# Altium PCB ESP32 PCB git.PcbDoc (part 1 of 2)
Units mil, origin at the board's own origin, x right, y up, seen from the top; angles counter-clockwise.
Board outline 2755 x 1050 mil, 4 copper layers (L1, L2, L3, L4), stack 61.583 mil thick; 64 components, 75 nets, 304 pads, 146 vias.
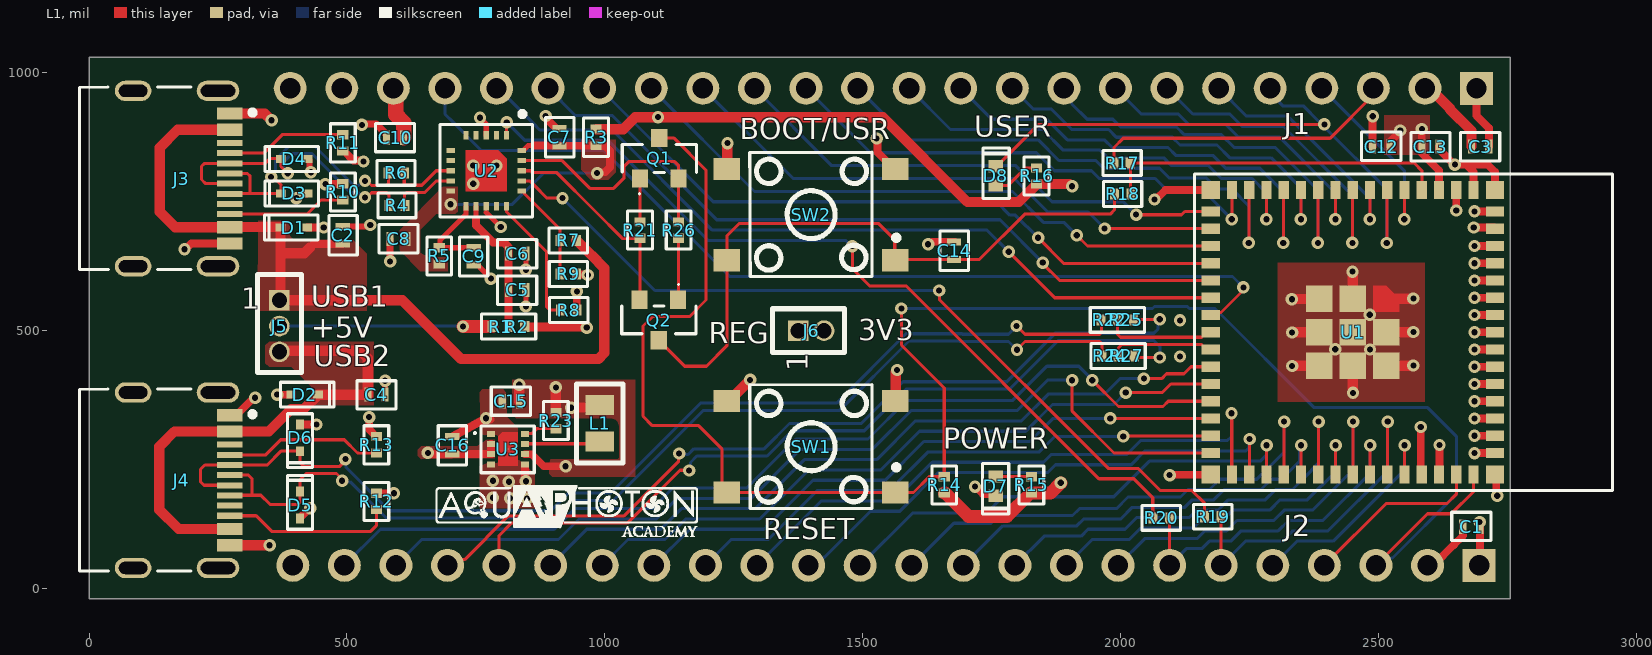
[diagram p0: L1 view]
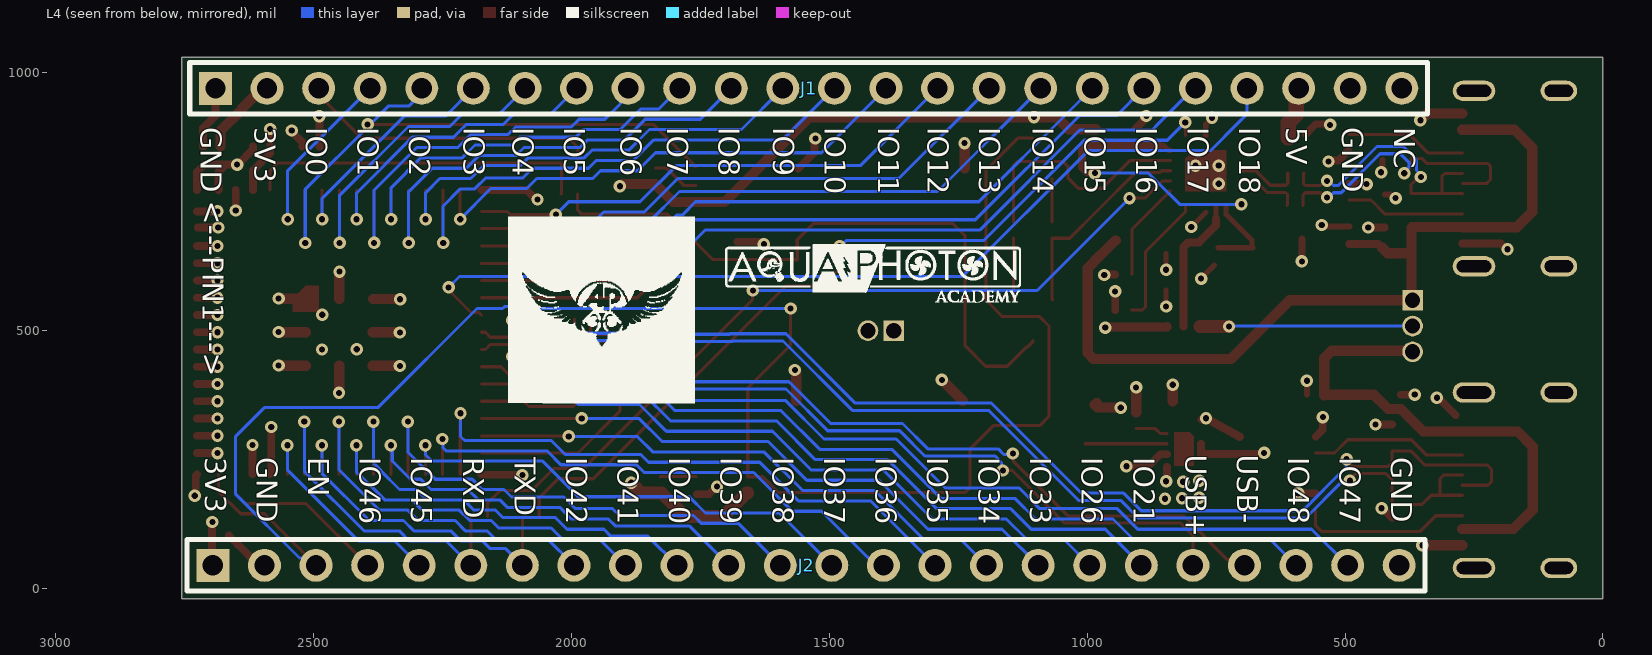
[diagram p1: L4 view, seen from below]
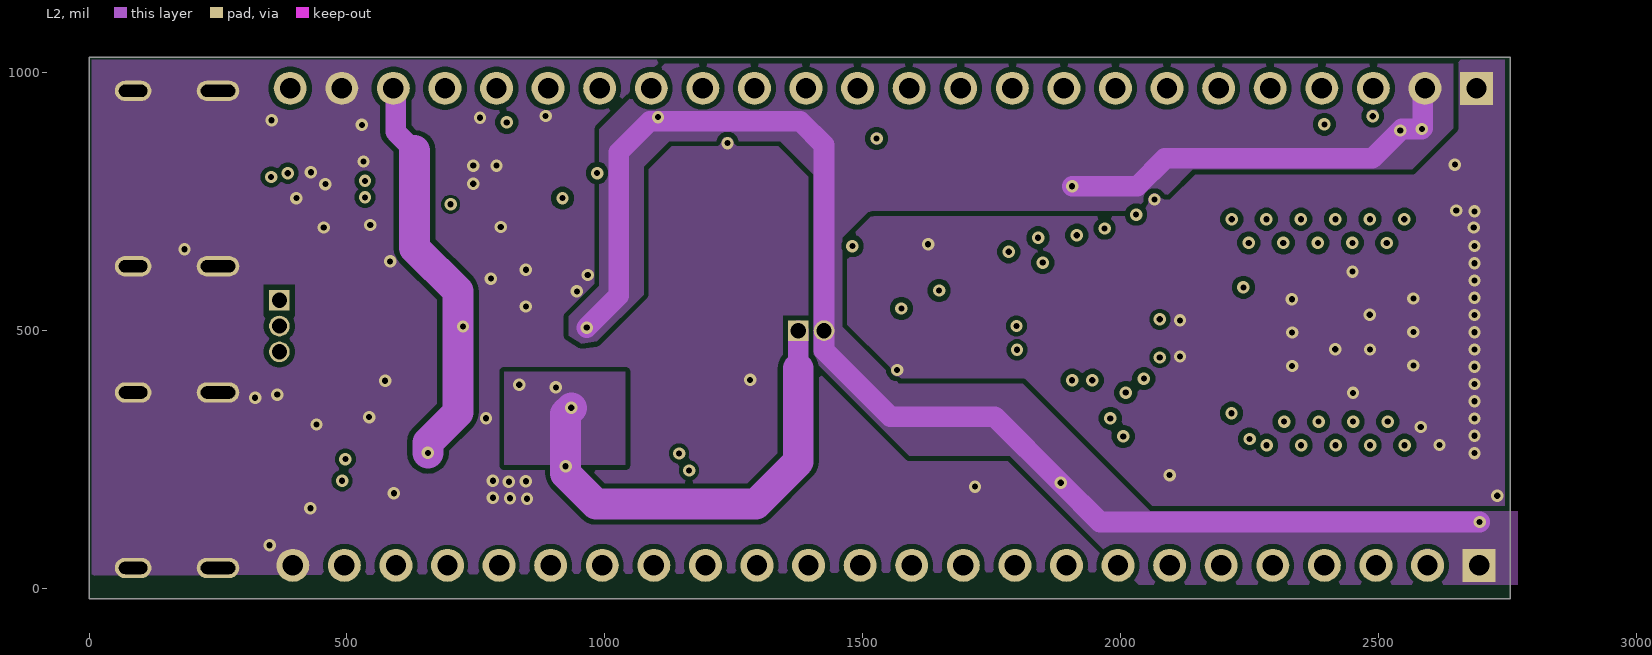
[diagram p2: L2]
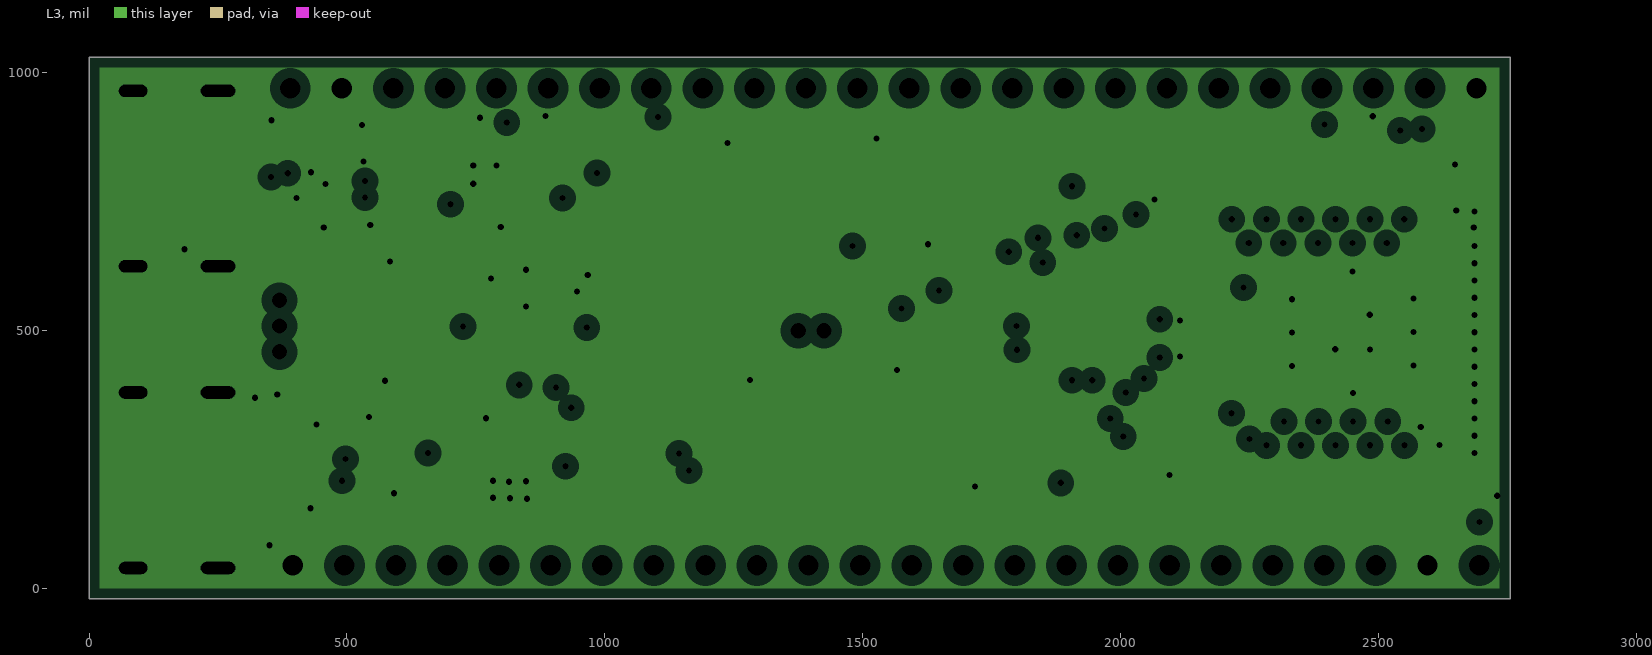
[diagram p3: L3, clearances drawn from the general rule]
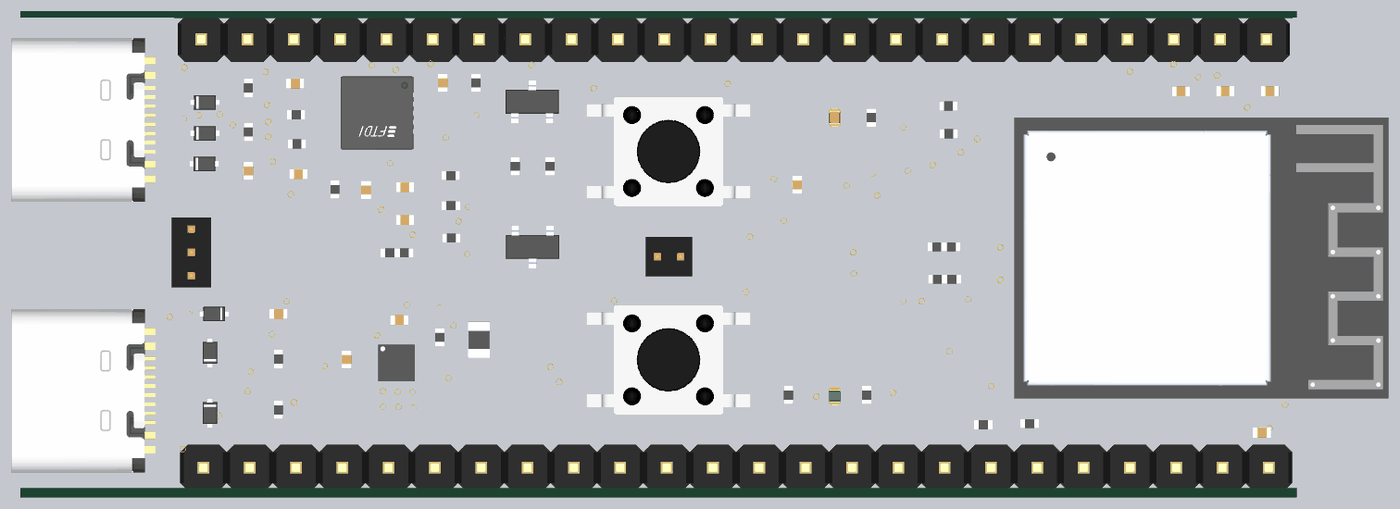
[diagram p4: 3D render of the assembled board from above, using the file's embedded part models]

## Layer stack, top to bottom
Top Solder: solder mask 0.4, Solder Resist, Dk 3.5
L1: signal copper 1.378
Dielectric 2: prepreg 3.9134, PP-006, Dk 4.1
L2: signal copper 0.5984
Dielectric 1: dielectric 49.8031, FR-4, Dk 4.8
L3: plane copper 0.5984, net GND
Dielectric 3: prepreg 3.9134, PP-006, Dk 4.1
L4: signal copper 1.378
Bottom Solder: solder mask 0.4, Solder Resist, Dk 3.5

## Board outline
0,-20 0,1030 2755,1030 2755,-20

## Design rules (kind name [scope] priority, off if disabled: settings)
Clearance SMALLER [WithinRoom('FTDI') or WithinRoom('USB-C2')or WithinRoom('USB-C1') or WithinRoom('BUCK')] p1: gap=6 ignorepadtopadclearanceinfootprint=FALSE
Clearance DIFF90 [InDifferentialPairClass('DIFF90')] p2: gap=8 ignorepadtopadclearanceinfootprint=FALSE
Clearance [All] p3: gap=10 ignorepadtopadclearanceinfootprint=FALSE except(6: SMDPad-SMDPad)
ComponentClearance R24_R27 [InComponent('R24') vs InComponent('R27')] p1: gap=0 collisioncheckmode=3 verticalgap=0 showdistances=FALSE
ComponentClearance R1_R2 [InComponent('R2') vs InComponent('R1')] p2: gap=0 collisioncheckmode=3 verticalgap=0 showdistances=FALSE
ComponentClearance R22_R25 [InComponent('R22') vs InComponent('R25')] p3: gap=0 collisioncheckmode=3 verticalgap=0 showdistances=FALSE
ComponentClearance [All] p4: gap=10 collisioncheckmode=3 verticalgap=10 showdistances=FALSE
DiffPairsRouting DIFF_1 [All] p1: maxlimit=8.1 minlimit=8 mostfreqgap=8 toplayer_minwidth=6.03 toplayer_maxwidth=6.23 toplayer_prefwidth=6.03 midlayer1_minwidth=5.1 midlayer1_maxwidth=5.2 midlayer1_prefwidth=5.1 bottomlayer_minwidth=6.03 bottomlayer_maxwidth=6.23 bottomlayer_prefwidth=6.03 maxuncoupledlength=500
MinimumSolderMaskSliver [All] p1: minsoldermaskwidth=3.15
PlaneClearance [All] p1: clearance=20
PlaneConnect [All] p1: pad.planeconnectstyle=Relief pad.reliefexpansion=20 pad.reliefentries=4 pad.reliefconductorwidth=20 pad.reliefairgap=10 via.planeconnectstyle=Direct via.reliefexpansion=20 via.reliefentries=4 via.reliefconductorwidth=10 via.reliefairgap=10
PolygonConnect [All] p1: connectstyle=Direct reliefconductorwidth=10 reliefentries=4 polygonreliefangle="90 Angle" airgapwidth=10
RoomDefinition BUCK [False vs False] p1: confinementstyle=ConfineIn formatcopy=TRUE lockcomponents=FALSE outline 750,216 872,216 872,331 750,331
RoomDefinition USB-C1 [False vs False] p2: confinementstyle=ConfineIn formatcopy=TRUE lockcomponents=FALSE outline 221,940 325,940 325,650 221,650
RoomDefinition USB-C2 [False vs False] p3: confinementstyle=ConfineIn formatcopy=TRUE lockcomponents=FALSE outline 215,351 343,351 343,68 215,68
RoomDefinition FTDI [False vs False] p4: confinementstyle=ConfineIn formatcopy=TRUE lockcomponents=FALSE outline 673,903 863,903 863,717 673,717
RoutingVias [All] p1: holewidth=12 width=24 viastyle="Through Hole" minholewidth=12 minwidth=24 maxholewidth=12 maxwidth=24
SilkToSilkClearance [All] p1: silktosilkclearance=6
SilkToSolderMaskClearance [IsPad] p1: minsilkscreentomaskgap=6 clearancetoexposedcopper=TRUE
SolderMaskExpansion [All] p1: expansion=2 istentingtop=FALSE
SupplyNets "Schematic Supply Nets_5" [InNet('GND')] p1: voltage=0.000
SupplyNets "Schematic Supply Nets_4" [InNet('+3V3_REG')] p2: voltage=0.000
SupplyNets "Schematic Supply Nets_3" [InNet('+5V_VBUS2')] p3: voltage=0.000
SupplyNets "Schematic Supply Nets_2" [InNet('+5V')] p4: voltage=0.000
SupplyNets "Schematic Supply Nets_1" [InNet('+3V3')] p5: voltage=0.000
SupplyNets "Schematic Supply Nets" [InNet('+5V_VBUS1')] p6: voltage=0.000
Width [All] p1: maxlimit=100 minlimit=6 preferedwidth=10 minimp=50.000000 maximp=50.000000 favimp=50.000000
23 further rules are at their usual default settings.

## Classes and differential pairs
differential pair class DIFF90: CON1_USB CON2_USB CON_ESP_USB ESP_USB FTDI_USB
differential pair FTDI_USB: +FTDI_USB_P -FTDI_USB_N
differential pair ESP_USB: +ESP_USB_P -ESP_USB_N
differential pair CON_ESP_USB: +CON_ESP_USB_P -CON_ESP_USB_N
differential pair CON2_USB: +CON2_USB_P -CON2_USB_N
differential pair CON1_USB: +CON1_USB_P -CON1_USB_N

## Components (designator, comment, footprint, x,y, rotation, side; value= is the part's Value field where it differs from the comment)
C1 "100nF, 50V" CAP_SMD_0402_SAMSUNG 2680,120 r0 top
C2 "100nF, 50V" CAP_SMD_0402_SAMSUNG 492,685 r270 top
C3 "10uF, 10V" CAP_SMD_0402_SAMSUNG 2697,857 r180 top
C4 "100nF, 50V" CAP_SMD_0402_SAMSUNG 557.27,376 r180 top
C5 "100nF, 50V" CAP_SMD_0402_SAMSUNG 830,579 r180 top
C6 "4.7uF, 16V" CAP_SMD_0402_SAMSUNG 830,649.56 r180 top
C7 "100nF, 50V" CAP_SMD_0402_SAMSUNG 912,875 r270 top
C8 "100nF, 50V" CAP_SMD_0402_SAMSUNG 600,678 r0 top
C9 "100nF, 50V" CAP_SMD_0402_SAMSUNG 746,644 r90 top
C10 "10uF, 10V" CAP_SMD_0402_SAMSUNG 593.27,874 r0 top
C12 "10uF, 10V" CAP_SMD_0402_SAMSUNG 2505.27,857 r0 top
C13 "100nF, 50V" CAP_SMD_0402_SAMSUNG 2600.73,857 r180 top
C14 "100nF, 50V" CAP_SMD_0402_SAMSUNG 1677,655 r270 top
C15 "10uF, 10V" CAP_SMD_0402_SAMSUNG 817.73,363 r0 top
C16 "4.7uF, 16V" CAP_SMD_0402_SAMSUNG 704,277.73 r270 top
D1 "LESD5D5.0CT1G" TVS-DIODE 397.02,700 r0 top
D2 "LESD5D5.0CT1G" TVS-DIODE 418,376 r180 top
D3 "LESD5D5.0CT1G" TVS-DIODE 398.02,766 r0 top
D4 "LESD5D5.0CT1G" TVS-DIODE 398.02,833 r0 top
D5 "LESD5D5.0CT1G" TVS-DIODE 409,162.02 r270 top
D6 "LESD5D5.0CT1G" TVS-DIODE 409,292 r90 top
D7 "GREEN" LED_0402_G 1758,198.7 r90 top
D8 "RED" LED_0402_R 1758,800 r270 top
J1 "X5511WV-24-C35D35-1000" HDR_1X24_2.54MM 2690,970 r90 bottom locked
J2 "X5511WV-24-C35D35-1000" HDR_1X24_2.54MM 2695,45 r90 bottom locked
J3 "TYPE-C-F10-1TDW" USB-C 179.04,794.92 r270 top locked
J4 "TYPE-C-F10-1TDW" USB-C 179.04,210.08 r270 top locked
J5 "X1311WV-03J-C40D24" "HDR_1X3_1.27mm - duplicate" 369,559 r0 top
J6 "X1311WV-02J-C40D24" HDR_1X2_1.27mm 1375,500 r90 top locked
L1 "2.2uH" Inductor_SMD_2.2uH 990,320.43 r90 top
Q1 "MMS8050-H-TP" SOT_TRANSISTOR 1068.2,795 r0 top
Q2 "MMS8050-H-TP" SOT_TRANSISTOR 1142,560 r180 top
R1 "0R" RES_SMD_0402 797.52,507.98 r0 top
R2 "0R" RES_SMD_0402 829.02,507.98 r180 top
R3 "0R" RES_SMD_0402 983,875 r270 top
R4 "27R" RES_SMD_0402 597,743 r0 top
R5 "0R" RES_SMD_0402 679,645 r90 top
R6 "27R" RES_SMD_0402 595.25,806 r0 top
R7 "4K7" RES_SMD_0402 929,675 r0 top
R8 "10K" RES_SMD_0402 930,540 r0 top
R9 "10K" RES_SMD_0402 929.25,610 r180 top
R10 "5.1K" RES_SMD_0402 492,769 r270 top
R11 "5.1K" RES_SMD_0402 492,864.25 r90 top
R12 "5.1K" RES_SMD_0402 557,169 r270 top
R13 "5.1K" RES_SMD_0402 557,278.75 r270 top
R14 "10K" RES_SMD_0402 1658,201 r270 top
R15 "1K" RES_SMD_0402 1827,201 r270 top
R16 "1K" RES_SMD_0402 1837,800 r270 top
R17 "27R" RES_SMD_0402 2003,825 r0 top
R18 "27R" RES_SMD_0402 2004,765 r0 top
R19 "0R" RES_SMD_0402 2178.63,139.37 r180 top
R20 "0R" RES_SMD_0402 2078.75,137 r180 top
R21 "10K" RES_SMD_0402 1068,695 r270 top
R22 "0R" RES_SMD_0402 1978,521 r0 top
R23 "100k" RES_SMD_0402 905,325.75 r90 top
R24 "0R" RES_SMD_0402 1979.25,451 r0 top
R25 "0R" RES_SMD_0402 2009.5,521 r180 top
R26 "10K" RES_SMD_0402 1143,695 r90 top
R27 "0R" RES_SMD_0402 2010.75,451 r180 top
SW1 "SMD Tactile Switch" "Tactile Switch_SMD" 1400,275 r180 top
SW2 "SMD Tactile Switch" "Tactile Switch_SMD" 1400,725 r180 top
U1 "ESP32-S3-MINI-1-N8" ESP32-S3-MINI-1-N8 2450.04,496.96 r270 top
U2 "FT231XQ-R" "USB TO UART _FTDI" 770.08,810.08 r270 top
U3 "TPS62162DSGR" BUCK_TPS62162DSGR 812.13,270.47 r0 top

## Footprints (in the part's own frame and the unit in brackets; to place one, negate y for a bottom-side part, rotate by r counter-clockwise, add the part's x,y. Pads: shape width x height; smd on the part's side, far side on the other; paste and mask are expansions set on the pad)
BUCK_TPS62162DSGR [mm] "PSON, 8-Leads, Body 2.00x2.00mm, Pitch 0.50mm, Thermal Pad 1.60x0.82mm, IPC Medium Density"
  rect 0.4x0.3 smd mask-2539.97: 1(-0.835,0.75) 2(-0.835,0.25) 3(-0.835,-0.25) 4(-0.835,-0.75) 5(0.835,-0.75) 6(0.835,-0.25) 7(0.835,0.25) 8(0.835,0.75)
  round 0.025 smd mask-2539.97: 4(0,0)
  L1 region: 0.475,0.825 0.475,-0.825 -0.475,-0.825 -0.475,0.635 -0.285,0.825
  silkscreen extent -1.68,-1.17 1.3,1.14, body extent -1.01,-1 0.99,1, height 0.81
CAP_SMD_0402_SAMSUNG [mm]
  rect 0.35x0.7 smd: 1(-0.425,0) 2(0.425,0)
  silkscreen extent -0.97,-0.69 0.97,0.71, body extent -0.5,-0.28 0.5,0.27, height 0.51
ESP32-S3-MINI-1-N8 [mm]
  rect 0.9x0.5 smd: 1(-7,5.95) 2(-7,5.1) 3(-7,4.25) 4(-7,3.4) 5(-7,2.55) 6(-7,1.7) 7(-7,0.85) 8(-7,0) 9(-7,-0.85) 10(-7,-1.7) 11(-7,-2.55) 12(-7,-3.4) 13(-7,-4.25) 14(-7,-5.1) 15(-7,-5.95) 31(7,-5.95) 32(7,-5.1) 33(7,-4.25) 34(7,-3.4) 35(7,-2.55) 36(7,-1.7) 37(7,-0.85) 38(7,0) 39(7,0.85) 40(7,1.7) 41(7,2.55) 42(7,3.4) 43(7,4.25) 44(7,5.1) 45(7,5.95)
  rect 0.5x0.9 smd: 16(-5.95,-7) 17(-5.1,-7) 18(-4.25,-7) 19(-3.4,-7) 20(-2.55,-7) 21(-1.7,-7) 22(-0.85,-7) 23(0,-7) 24(0.85,-7) 25(1.7,-7) 26(2.55,-7) 27(3.4,-7) 28(4.25,-7) 29(5.1,-7) 30(5.95,-7) 46(5.95,7) 47(5.1,7) 48(4.25,7) 49(3.4,7) 50(2.55,7) 51(1.7,7) 52(0.85,7) 53(0,7) 54(-0.85,7) 55(-1.7,7) 56(-2.55,7) 57(-3.4,7) 58(-4.25,7) 59(-5.1,7) 60(-5.95,7)
  rect 1.3x1.3 smd: 61(0,0) 67(0,1.65) 68(1.65,1.65) 69(-1.65,0) 70(1.65,0) 71(-1.65,-1.65) 72(0,-1.65) 73(1.65,-1.65)
  rect 0.9x0.9 smd: 62(-7,7) 63(-7,-7) 64(7,-7) 65(7,7)
  round 0.025 smd: 66(-1.65,1.65)
  L1 region: -1,1 -2.3,1 -2.3,1.65 -1.65,2.3 -1,2.3
  silkscreen extent -7.8,-7.8 7.8,12.8, body extent -7.7,-7.73 7.7,12.78, height 2.56
HDR_1X2_1.27mm [mil]
  rect 40x40 hole 29.53: 1(0,0)
  round 40 hole 29.53: 2(0,-50)
  silkscreen extent -42,-90 43,50, body extent -42,-75 43,25, height 155
"HDR_1X3_1.27mm - duplicate" [mil]
  rect 40x40 hole 29.53: 1(0,0)
  round 40 hole 29.53: 2(0,-50) 3(0,-100)
  silkscreen extent -42,-140 42,50, body extent -42,-125 42,25, height 154
HDR_1X24_2.54MM [mil]
  rect 64x64 hole 39.37: 1(0,0)
  round 64 hole 39.37: 2(0,-100) 3(0,-200) 4(0,-300) 5(0,-400) 6(0,-500) 7(0,-600) 8(0,-700) 9(0,-800) 10(0,-900) 11(0,-1000) 12(0,-1100) 13(0,-1200) 14(0,-1300) 15(0,-1400) 16(0,-1500) 17(0,-1600) 18(0,-1700) 19(0,-1800) 20(0,-1900) 21(0,-2000) 22(0,-2100) 23(0,-2200) 24(0,-2300)
  silkscreen extent -50,-2350 50,50, body extent -50,-2350 48,50, height 415
Inductor_SMD_2.2uH [mm]
  rect 1x1.4 smd: 1(-0.9,0) 2(0.9,0)
  silkscreen extent -1.96,-1.14 1.93,1.14, body extent -1.01,-0.63 0.99,0.63, height 1.01
LED_0402_G [mm]
  rect 0.6x0.7 smd: 1(-0.475,0) 2(0.475,0)
  silkscreen extent -1.37,-0.64 1.12,0.66, body extent -0.5,-0.3 0.5,0.3, height 0.21
LED_0402_R [mm]
  rect 0.6x0.7 smd: 1(-0.475,0) 2(0.475,0)
  silkscreen extent -1.37,-0.64 1.12,0.66, body extent -0.5,-0.3 0.5,0.3, height 0.21
RES_SMD_0402 [mm]
  rect 0.45x0.55 smd: 1(-0.4,0) 2(0.4,0)
  silkscreen extent -0.94,-0.61 0.94,0.61, body extent -0.5,-0.25 0.5,0.25, height 0.38
SOT_TRANSISTOR [mm]
  rect 0.8x0.9 smd: 1(0,0) 2(1.9,0) 3(0.95,2)
  silkscreen extent -0.87,-0.75 2.78,1.68, body extent -0.54,-0.18 2.38,2.18, height 1.26
"Tactile Switch_SMD" [mm]
  rect 1.3x1.1 smd: 1(-4.15,2.25) 2(4.15,2.25) 3(-4.15,-2.25) 4(4.15,-2.25)
  silkscreen extent -4.32,-3.07 3.03,3.05, body extent -4.47,-3.05 4.53,2.95, height 4.31
TVS-DIODE [mm] "Bidirectional 5V SOD-523 ESD and Surge Protection (TVS/ESD) ROHS"
  rect 0.48x0.4 smd: 1(-0.66,0) 2(0.66,0)
  silkscreen extent -1.45,-0.64 1.19,0.61, body extent -0.8,-0.4 0.8,0.4, height 0.71
"USB TO UART _FTDI" [mm]
  rect 0.4x0.25 smd: 1(-1.75,1) 2(-1.75,0.5) 3(-1.75,0) 4(-1.75,-0.5) 5(-1.75,-1) 11(1.75,-1) 12(1.75,-0.5) 13(1.75,0) 14(1.75,0.5) 15(1.75,1)
  rect 0.25x0.4 smd: 6(-1,-1.75) 7(-0.5,-1.75) 8(0,-1.75) 9(0.5,-1.75) 10(1,-1.75) 16(1,1.75) 17(0.5,1.75) 18(0,1.75) 19(-0.5,1.75) 20(-1,1.75)
  round 0.025 smd: 21(0,0)
  L1 region: 1,-1 -1,-1 -1,0.6 -0.6,1 1,1
  silkscreen extent -2.92,-2.29 2.29,2.29, body extent -2.94,-2.94 2.94,2.94, height 0.25
USB-C [mm]
  rect 0.6x1.25 smd mask-2539.97: "A1 B12"(-3.2,2.378) "A4 B9"(-2.4,2.378) "B1 A12"(3.2,2.378) "B4 A9"(2.4,2.378)
  rect 0.3x1.25 smd mask-2539.97: A5(-1.25,2.378) A6(-0.25,2.378) A7(0.25,2.378) A8(1.25,2.378) B5(1.75,2.378) B6(0.75,2.378) B7(-0.75,2.378) B8(-1.75,2.378)
  oval 1x2.1 hole 0.6 slot 1.7 at 90 deg: S1(-4.32,1.803) S2(4.32,1.803)
  oval 1x1.8 hole 0.6 slot 1.4 at 90 deg: S3(-4.318,-2.377) S4(4.32,-2.377)
  silkscreen extent -4.5,-5.03 4.47,3.62, body extent -4.48,-5.03 4.47,2.87, height 3.22

## Part data
C1 C2 C4 C5 C7 C8 C9 C13 C14: library part CL05B104KB54PNC, "CAP CER 0.1UF 50V X7R 0402", Manufacturer=Samsung, Supplier Part Number=C307331, ComponentLink1Description=https://datasheet.ciiva.com:443/pdfs/VipMasterIC/IC/SEMS/SEMS-S-A0006318249/SEMS-S-A0006320959-1.pdf?src-supplier=IHS+Markit, ComponentLink1URL=https://datasheet.ciiva.com:443/pdfs/VipMasterIC/IC/SEMS/SEMS-S-A0006318249/SEMS-S-A0006320959-1.pdf?src-supplier=IHS+Markit, ComponentLink2Description=https://datasheet.octopart.com/CL05B104KB54PNC-Samsung-datasheet-8326407.pdf?src-supplier=TME, ComponentLink2URL=https://datasheet.octopart.com/CL05B104KB54PNC-Samsung-datasheet-8326407.pdf?src-supplier=TME, Manufacturer Part Number=CL05B104KB54PNC, Supplier=LCSC
C3 C10 C12 C15: library part CL05A106MP8NUB8, "CAP CER 10UF 10V X5R 0402", Manufacturer=Samsung, Supplier Part Number=C307415, ComponentLink1Description=https://datasheet.ciiva.com:443/pdfs/VipMasterIC/IC/SEMS/SEMS-S-A0008521219/SEMS-S-A0008521325-1.pdf?src-supplier=IHS+Markit, ComponentLink1URL=https://datasheet.ciiva.com:443/pdfs/VipMasterIC/IC/SEMS/SEMS-S-A0008521219/SEMS-S-A0008521325-1.pdf?src-supplier=IHS+Markit, ComponentLink2Description=http://www.samsungsem.com/kr/support/product-search/mlcc/CL05A106MP8NUB8.jsp?src-supplier=Digikey, ComponentLink2URL=http://www.samsungsem.com/kr/support/product-search/mlcc/CL05A106MP8NUB8.jsp?src-supplier=Digikey, ComponentLink3Description=https://datasheet.octopart.com/CL05A106MP8NUB8-Samsung-Electro-Mechanics-datasheet-136460857.pdf?src-supplier=Future+Electronics, ComponentLink3URL=https://datasheet.octopart.com/CL05A106MP8NUB8-Samsung-Electro-Mechanics-datasheet-136460857.pdf?src-supplier=Future+Electronics, Manufacturer Part Number=CL05A106MP8NUB8, Supplier=LCSC
C6 C16: library part CL05A475MO5NUNC, "4.7 µF ±20% 16V Ceramic Capacitor X5R 0402 (1005 Metric)", Manufacturer=Samsung, Supplier Part Number=C318563, ComponentLink1Description=https://datasheet.ciiva.com:443/pdfs/VipMasterIC/IC/SEMS/SEMS-S-A0008384515/SEMS-S-A0008898881-1.pdf?src-supplier=IHS+Markit, ComponentLink1URL=https://datasheet.ciiva.com:443/pdfs/VipMasterIC/IC/SEMS/SEMS-S-A0008384515/SEMS-S-A0008898881-1.pdf?src-supplier=IHS+Markit, ComponentLink2Description=http://www.farnell.com/datasheets/2710653.pdf?src-supplier=Farnell, ComponentLink2URL=http://www.farnell.com/datasheets/2710653.pdf?src-supplier=Farnell, ComponentLink3Description=http://www.samsungsem.com/kr/support/product-search/mlcc/CL05A475MO5NUNC.jsp?src-supplier=Digikey, ComponentLink3URL=http://www.samsungsem.com/kr/support/product-search/mlcc/CL05A475MO5NUNC.jsp?src-supplier=Digikey, ComponentLink4Description=http://www.farnell.com/datasheets/2710653.pdf?src-supplier=Newark, ComponentLink4URL=http://www.farnell.com/datasheets/2710653.pdf?src-supplier=Newark, ComponentLink5Description=http://www.farnell.com/datasheets/2710653.pdf?src-supplier=Element14, ComponentLink5URL=http://www.farnell.com/datasheets/2710653.pdf?src-supplier=Element14, ComponentLink6Description=https://datasheet.octopart.com/CL05A475MO5NUNC-Samsung-Electro-Mechanics-datasheet-123102911.pdf?src-supplier=Future+Electronics, ComponentLink6URL=https://datasheet.octopart.com/CL05A475MO5NUNC-Samsung-Electro-Mechanics-datasheet-123102911.pdf?src-supplier=Future+Electronics, Manufacturer Part Number=CL05A475MO5NUNC, Supplier=LCSC
D1 D2 D3 D4 D5 D6: "9.4A 18.6V 5.6V Bidirectional 5V SOD-523 ESD and Surge Protection (TVS/ESD) ROHS", Manufacturer=LRC, Supplier Part Number=C383211, Manufacturer Part Number=LESD5D5.0CT1G, Supplier=LCSC
D7: library part VLMG1500-GS08, "LED GREEN 0402 SMD", Manufacturer=Vishay, Supplier Part Number=C511404, ComponentLink1Description=https://datasheet.ciiva.com:443/pdfs/VipMasterIC/IC/VISH/VISH-S-A0003457490/VISH-S-A0003457490-1.pdf?src-supplier=IHS+Markit, ComponentLink1URL=https://datasheet.ciiva.com:443/pdfs/VipMasterIC/IC/VISH/VISH-S-A0003457490/VISH-S-A0003457490-1.pdf?src-supplier=IHS+Markit, ComponentLink2Description=https://datasheet.ciiva.com/12071/vlmo1500-244705-12071911.pdf?src-supplier=Mouser, ComponentLink2URL=https://datasheet.ciiva.com/12071/vlmo1500-244705-12071911.pdf?src-supplier=Mouser, ComponentLink3Description=https://datasheet.ciiva.com/30005/vlmo1500-30005134.pdf?src-supplier=Avnet, ComponentLink3URL=https://datasheet.ciiva.com/30005/vlmo1500-30005134.pdf?src-supplier=Avnet, Manufacturer Part Number=VLMG1500-GS08, Supplier=LCSC
D8: library part VLMS1500-GS08, "LED RED 0402 SMD", Manufacturer=Vishay, Supplier Part Number=C511370, ComponentLink1Description=https://datasheet.ciiva.com:443/pdfs/VipMasterIC/IC/VISH/VISH-S-A0003457490/VISH-S-A0003457490-1.pdf?src-supplier=IHS+Markit, ComponentLink1URL=https://datasheet.ciiva.com:443/pdfs/VipMasterIC/IC/VISH/VISH-S-A0003457490/VISH-S-A0003457490-1.pdf?src-supplier=IHS+Markit, ComponentLink2Description=http://www.farnell.com/datasheets/1809983.pdf?src-supplier=Farnell, ComponentLink2URL=http://www.farnell.com/datasheets/1809983.pdf?src-supplier=Farnell, ComponentLink3Description=http://www.mouser.com/ds/2/427/vlmo1500-244705.pdf?src-supplier=Mouser, ComponentLink3URL=http://www.mouser.com/ds/2/427/vlmo1500-244705.pdf?src-supplier=Mouser, ComponentLink4Description=http://www.alliedelec.com/m/d/cfc385e1097fc985ee9a50a3551ac188.pdf?src-supplier=Allied+Electronics, ComponentLink4URL=http://www.alliedelec.com/m/d/cfc385e1097fc985ee9a50a3551ac188.pdf?src-supplier=Allied+Electronics, ComponentLink5Description=https://datasheet.octopart.com/VLMS1500-GS08-Vishay-datasheet-62332426.pdf?src-supplier=Newark, ComponentLink5URL=https://datasheet.octopart.com/VLMS1500-GS08-Vishay-datasheet-62332426.pdf?src-supplier=Newark, ComponentLink6Description=https://datasheet.octopart.com/VLMS1500-GS08-Vishay-datasheet-33014519.pdf?src-supplier=Element14, ComponentLink6URL=https://datasheet.octopart.com/VLMS1500-GS08-Vishay-datasheet-33014519.pdf?src-supplier=Element14, ComponentLink7Description=http://datasheet.octopart.com/VLMS1500-GS08-Vishay-datasheet-21227148.pdf?src-supplier=Avnet, ComponentLink7URL=http://datasheet.octopart.com/VLMS1500-GS08-Vishay-datasheet-21227148.pdf?src-supplier=Avnet, ComponentLink8Description=http://www.farnell.com/datasheets/1809983.pdf?src-supplier=Newark, ComponentLink8URL=http://www.farnell.com/datasheets/1809983.pdf?src-supplier=Newark, ComponentLink9Description=http://www.farnell.com/datasheets/2050839.pdf?src-supplier=Newark, ComponentLink9URL=http://www.farnell.com/datasheets/2050839.pdf?src-supplier=Newark, ComponentLink10Description=https://datasheet.octopart.com/VLMS1500-GS08-Vishay-datasheet-21227148.pdf?src-supplier=Future+Electronics, ComponentLink10URL=https://datasheet.octopart.com/VLMS1500-GS08-Vishay-datasheet-21227148.pdf?src-supplier=Future+Electronics, ComponentLink11Description=http://datasheet.octopart.com/VLMS1500-GS08-Vishay-datasheet-21227148.pdf?src-supplier=Quest, ComponentLink11URL=http://datasheet.octopart.com/VLMS1500-GS08-Vishay-datasheet-21227148.pdf?src-supplier=Quest, ComponentLink12Description=http://datasheet.octopart.com/VLMS1500-GS08-Vishay-datasheet-21227148.pdf?src-supplier=NAC+Semi, ComponentLink12URL=http://datasheet.octopart.com/VLMS1500-GS08-Vishay-datasheet-21227148.pdf?src-supplier=NAC+Semi, ComponentLink13Description=http://datasheet.octopart.com/VLMS1500-GS08-Vishay-datasheet-21227148.pdf?src-supplier=LCSC, ComponentLink13URL=http://datasheet.octopart.com/VLMS1500-GS08-Vishay-datasheet-21227148.pdf?src-supplier=LCSC, Manufacturer Part Number=VLMS1500-GS08, Supplier=LCSC
J1 J2: library part X6511WV-24H-C60D30, "Gold 250V 3A Policy 2.5mm 24P 260℃ -40℃~+105℃ 2.54mm Brass Black Single Row 2.54mm 1x24P SMD,P=2.54mm Pin Headers ROHS", Manufacturer="XKB Connection", Supplier Part Number=C2883449, Manufacturer Part Number=X5511WV-24-C35D35-1000, Supplier=LCSC
J3 J4: "16P Type-C SMD USB Connectors", Manufacturer=XYECONN, Supplier Part Number=C20883031, Manufacturer Part Number=TYPE-C-F10-1TDW, Supplier=LCSC
J5: "Gold 250V 3A Policy 1mm 3P 260℃ -40℃~+105℃ 1.27mm Brass Black Single Row 1.27mm 1x3P Plugin,P=1.27mm Pin Headers ROHS", Manufacturer="XKB Connection", Supplier Part Number=C5243683, Manufacturer Part Number=X1311WV-03J-C40D24, Supplier=LCSC
J6: "Gold 250V 3A Policy 1mm 2P 260℃ -40℃~+105℃ 1.27mm Brass Black Single Row 1x2P 1.27mm Plugin,P=1.27mm Pin Headers ROHS", Manufacturer="XKB Connection", Supplier Part Number=C5243682, Manufacturer Part Number=X1311WV-02J-C40D24, Supplier=LCSC
L1: library part MLP2012H2R2MT0S1, "2.2 µH Shielded Multilayer Inductor 1 A 195mOhm Max 0805 (2012 Metric)", Manufacturer=TDK, Supplier Part Number=C383369, ComponentLink1Description=https://datasheet.ciiva.com:443/pdfs/VipMasterIC/IC/TDKC/TDKC-S-A0006854088/TDKC-S-A0006854088-1.pdf?src-supplier=IHS+Markit, ComponentLink1URL=https://datasheet.ciiva.com:443/pdfs/VipMasterIC/IC/TDKC/TDKC-S-A0006854088/TDKC-S-A0006854088-1.pdf?src-supplier=IHS+Markit, ComponentLink2Description=https://datasheet.ciiva.com/29697/inductor-commercial-power-mlp-en-29697706.pdf?src-supplier=Digikey, ComponentLink2URL=https://datasheet.ciiva.com/29697/inductor-commercial-power-mlp-en-29697706.pdf?src-supplier=Digikey, ComponentLink3Description=https://datasheet.ciiva.com/29697/inductor-commercial-power-mlp-en-29697707.pdf?src-supplier=Digikey, ComponentLink3URL=https://datasheet.ciiva.com/29697/inductor-commercial-power-mlp-en-29697707.pdf?src-supplier=Digikey, ComponentLink4Description=https://datasheet.ciiva.com/29697/inductor-commercial-power-mlp-en-29697708.pdf?src-supplier=Digikey, ComponentLink4URL=https://datasheet.ciiva.com/29697/inductor-commercial-power-mlp-en-29697708.pdf?src-supplier=Digikey, Manufacturer Part Number=MLP2012H2R2MT0S1, Supplier=LCSC
Q1 Q2: "Bipolar (BJT) Transistor NPN 25 V 500 mA 150MHz 300 mW Surface Mount SOT-23", Manufacturer=MCC, Supplier Part Number=C668971, ComponentLink1Description=https://datasheet.ciiva.com:443/pdfs/VipMasterIC/IC/MCCC/MCCC-S-A0005071305/MCCC-S-A0005071739-1.pdf?src-supplier=IHS+Markit, ComponentLink1URL=https://datasheet.ciiva.com:443/pdfs/VipMasterIC/IC/MCCC/MCCC-S-A0005071305/MCCC-S-A0005071739-1.pdf?src-supplier=IHS+Markit, ComponentLink2Description=http://components.arrow.com/part/dataview/56206496S302966N2022?src-supplier=Arrow+Electronics, ComponentLink2URL=http://components.arrow.com/part/dataview/56206496S302966N2022?src-supplier=Arrow+Electronics, ComponentLink3Description=http://www.mccsemi.com/up_pdf/MMS8050(SOT-23).pdf?src-supplier=Digikey, ComponentLink3URL=http://www.mccsemi.com/up_pdf/MMS8050(SOT-23).pdf?src-supplier=Digikey, Manufacturer Part Number=MMS8050-H-TP, Supplier=LCSC
R1 R2 R3 R5 R19 R20 R22 R24 R25 R27: library part RC0402JR-070RL, "0 Ohms Jumper Chip Resistor 0402 (1005 Metric) Moisture Resistant Thick Film", Manufacturer=Yageo, Supplier Part Number=C60485, ComponentLink1Description=https://datasheet.ciiva.com:443/pdfs/VipMasterIC/IC/YAGO/YAGO-S-A0008145938/YAGO-S-A0008145938-1.pdf?src-supplier=IHS+Markit, ComponentLink1URL=https://datasheet.ciiva.com:443/pdfs/VipMasterIC/IC/YAGO/YAGO-S-A0008145938/YAGO-S-A0008145938-1.pdf?src-supplier=IHS+Markit, Manufacturer Part Number=RC0402JR-070RL, Supplier=LCSC
R4 R6 R17 R18: library part RC0402FR-0727RL, "27 Ohms ±1% 0.063W, 1/16W Chip Resistor 0402 (1005 Metric) Moisture Resistant Thick Film", Manufacturer=Yageo, Supplier Part Number=C138021, ComponentLink1Description=https://datasheet.ciiva.com:443/pdfs/VipMasterIC/IC/YAGO/YAGO-S-A0008145938/YAGO-S-A0008145938-1.pdf?src-supplier=IHS+Markit, ComponentLink1URL=https://datasheet.ciiva.com:443/pdfs/VipMasterIC/IC/YAGO/YAGO-S-A0008145938/YAGO-S-A0008145938-1.pdf?src-supplier=IHS+Markit, ComponentLink2Description=https://datasheet.ciiva.com/11808/0900766b80c66297-11808450.pdf?src-supplier=Rs, ComponentLink2URL=https://datasheet.ciiva.com/11808/0900766b80c66297-11808450.pdf?src-supplier=Rs, ComponentLink3Description=https://datasheet.ciiva.com/7849/1018594-7849927.pdf?src-supplier=Element14, ComponentLink3URL=https://datasheet.ciiva.com/7849/1018594-7849927.pdf?src-supplier=Element14, ComponentLink4Description=https://datasheet.ciiva.com/7849/1018594-7849926.pdf?src-supplier=Element14, ComponentLink4URL=https://datasheet.ciiva.com/7849/1018594-7849926.pdf?src-supplier=Element14, ComponentLink5Description=https://datasheet.ciiva.com/17044/pyu-rc0402-51-rohs-l-6-17044345.pdf?src-supplier=Future+Electronics, ComponentLink5URL=https://datasheet.ciiva.com/17044/pyu-rc0402-51-rohs-l-6-17044345.pdf?src-supplier=Future+Electronics, ComponentLink6Description=https://datasheet.ciiva.com/15189/getdatasheetpartid-327852-15189402.pdf?src-supplier=Verical, ComponentLink6URL=https://datasheet.ciiva.com/15189/getdatasheetpartid-327852-15189402.pdf?src-supplier=Verical, Manufacturer Part Number=RC0402FR-0727RL, Supplier=LCSC
R7: library part RC0402FR-074K7L, "4.7 kOhms ±1% 0.063W, 1/16W Chip Resistor 0402 (1005 Metric) Moisture Resistant Thick Film", Manufacturer=Yageo, Supplier Part Number=C105871, ComponentLink1Description=https://datasheet.ciiva.com:443/pdfs/VipMasterIC/IC/YAGO/YAGO-S-A0008145938/YAGO-S-A0008145938-1.pdf?src-supplier=IHS+Markit, ComponentLink1URL=https://datasheet.ciiva.com:443/pdfs/VipMasterIC/IC/YAGO/YAGO-S-A0008145938/YAGO-S-A0008145938-1.pdf?src-supplier=IHS+Markit, ComponentLink2Description=https://datasheet.ciiva.com/22661/1686128-22661342.pdf?src-supplier=Element14, ComponentLink2URL=https://datasheet.ciiva.com/22661/1686128-22661342.pdf?src-supplier=Element14, ComponentLink3Description=https://datasheet.ciiva.com/7850/1018594-7850022.pdf?src-supplier=Element14, ComponentLink3URL=https://datasheet.ciiva.com/7850/1018594-7850022.pdf?src-supplier=Element14, ComponentLink4Description=https://datasheet.ciiva.com/7850/1018594-7850023.pdf?src-supplier=Element14, ComponentLink4URL=https://datasheet.ciiva.com/7850/1018594-7850023.pdf?src-supplier=Element14, ComponentLink5Description=https://datasheet.ciiva.com/15215/getdatasheetpartid-328119-15215035.pdf?src-supplier=Verical, ComponentLink5URL=https://datasheet.ciiva.com/15215/getdatasheetpartid-328119-15215035.pdf?src-supplier=Verical, Manufacturer Part Number=RC0402FR-074K7L, Supplier=LCSC
R8 R9 R14 R21 R26: library part AC0402FR-0710KL, "62.5mW Thick Film Resistors 50V ±100ppm/℃ ±1% 10kΩ 0402 Chip Resistor - Surface Mount ROHS", Manufacturer=Yageo, Supplier Part Number=YAG3436CT-ND, ComponentLink1Description=https://datasheet.ciiva.com:443/pdfs/VipMasterIC/IC/YAGO/YAGO-S-A0003597364/YAGO-S-A0003597364-1.pdf?src-supplier=IHS+Markit, ComponentLink1URL=https://datasheet.ciiva.com:443/pdfs/VipMasterIC/IC/YAGO/YAGO-S-A0003597364/YAGO-S-A0003597364-1.pdf?src-supplier=IHS+Markit, ComponentLink2Description=https://datasheet.ciiva.com/12656/pyu-ac-51-rohs-l-2-12656634.pdf?src-supplier=Mouser, ComponentLink2URL=https://datasheet.ciiva.com/12656/pyu-ac-51-rohs-l-2-12656634.pdf?src-supplier=Mouser, Manufacturer Part Number=AC0402FR-0710KL, Supplier=LCSC
R10 R11 R12 R13: library part AC0402FR-075K1L, "5.1 kOhms ±1% 0.063W, 1/16W Chip Resistor 0402 (1005 Metric) Automotive AEC-Q200, Moisture Resistant Thick Film", Manufacturer=Yageo, Supplier Part Number=C144745, ComponentLink1Description=https://datasheet.ciiva.com:443/pdfs/VipMasterIC/IC/YAGO/YAGO-S-A0003597364/YAGO-S-A0003597364-1.pdf?src-supplier=IHS+Markit, ComponentLink1URL=https://datasheet.ciiva.com:443/pdfs/VipMasterIC/IC/YAGO/YAGO-S-A0003597364/YAGO-S-A0003597364-1.pdf?src-supplier=IHS+Markit, ComponentLink2Description=https://datasheet.octopart.com/AC0402FR-075K1L-Yageo-datasheet-166720450.pdf?src-supplier=Future+Electronics, ComponentLink2URL=https://datasheet.octopart.com/AC0402FR-075K1L-Yageo-datasheet-166720450.pdf?src-supplier=Future+Electronics, ComponentLink3Description=http://www.yageo.com/documents/recent/PYu-AC_51_RoHS_L_2_revised.pdf?src-supplier=Future+Electronics, ComponentLink3URL=http://www.yageo.com/documents/recent/PYu-AC_51_RoHS_L_2_revised.pdf?src-supplier=Future+Electronics, Manufacturer Part Number=AC0402FR-075K1L, Supplier=LCSC
R15 R16: library part RC0402FR-071KL, "RES 1K OHM 1% 1/16W 0402", Manufacturer=Yageo, Supplier Part Number=C106235, ComponentLink1Description=https://datasheet.ciiva.com:443/pdfs/VipMasterIC/IC/YAGO/YAGO-S-A0008145938/YAGO-S-A0008145938-1.pdf?src-supplier=IHS+Markit, ComponentLink1URL=https://datasheet.ciiva.com:443/pdfs/VipMasterIC/IC/YAGO/YAGO-S-A0008145938/YAGO-S-A0008145938-1.pdf?src-supplier=IHS+Markit, ComponentLink2Description=https://datasheet.ciiva.com/11819/0900766b80c66297-11819477.pdf?src-supplier=Rs, ComponentLink2URL=https://datasheet.ciiva.com/11819/0900766b80c66297-11819477.pdf?src-supplier=Rs, ComponentLink3Description=https://datasheet.ciiva.com/22747/1018594-22747513.pdf?src-supplier=Element14, ComponentLink3URL=https://datasheet.ciiva.com/22747/1018594-22747513.pdf?src-supplier=Element14, ComponentLink4Description=https://datasheet.ciiva.com/12666/pyu-rc0402-51-rohs-l-6-r-12666741.pdf?src-supplier=Mouser, ComponentLink4URL=https://datasheet.ciiva.com/12666/pyu-rc0402-51-rohs-l-6-r-12666741.pdf?src-supplier=Mouser, ComponentLink5Description=https://datasheet.ciiva.com/17063/pyu-rc0402-51-rohs-l-6-r-17063193.pdf?src-supplier=Future+Electronics, ComponentLink5URL=https://datasheet.ciiva.com/17063/pyu-rc0402-51-rohs-l-6-r-17063193.pdf?src-supplier=Future+Electronics, ComponentLink6Description=https://datasheet.ciiva.com/7983/1018594-7983502.pdf?src-supplier=Element14, ComponentLink6URL=https://datasheet.ciiva.com/7983/1018594-7983502.pdf?src-supplier=Element14, ComponentLink7Description=https://datasheet.ciiva.com/7849/1018594-7849869.pdf?src-supplier=Element14, ComponentLink7URL=https://datasheet.ciiva.com/7849/1018594-7849869.pdf?src-supplier=Element14, ComponentLink8Description=https://datasheet.ciiva.com/7849/1018594-7849871.pdf?src-supplier=Element14, ComponentLink8URL=https://datasheet.ciiva.com/7849/1018594-7849871.pdf?src-supplier=Element14, Manufacturer Part Number=RC0402FR-071KL, Supplier=LCSC
R23: library part AC0402FR-07100KL, "RES SMD 100K OHM 1% 1/16W 0402", Manufacturer=Yageo, Supplier Part Number=C144809, ComponentLink1Description=https://datasheet.ciiva.com:443/pdfs/VipMasterIC/IC/YAGO/YAGO-S-A0003597364/YAGO-S-A0003597364-1.pdf?src-supplier=IHS+Markit, ComponentLink1URL=https://datasheet.ciiva.com:443/pdfs/VipMasterIC/IC/YAGO/YAGO-S-A0003597364/YAGO-S-A0003597364-1.pdf?src-supplier=IHS+Markit, ComponentLink2Description=https://www.yageo.com/upload/media/product/productsearch/datasheet/rchip/PYu-AC_51_RoHS_L_7.pdf?src-supplier=Digikey, ComponentLink2URL=https://www.yageo.com/upload/media/product/productsearch/datasheet/rchip/PYu-AC_51_RoHS_L_7.pdf?src-supplier=Digikey, ComponentLink3Description=https://datasheet.octopart.com/AC0402FR-07100KL-Yageo-datasheet-166720450.pdf?src-supplier=Future+Electronics, ComponentLink3URL=https://datasheet.octopart.com/AC0402FR-07100KL-Yageo-datasheet-166720450.pdf?src-supplier=Future+Electronics, ComponentLink4Description=http://www.yageo.com/NewPortal/yageodocoutput?fileName=/pdf/R-Chip/PYu-AC_51_RoHS_L_6.pdf&src-supplier=Digikey, ComponentLink4URL=http://www.yageo.com/NewPortal/yageodocoutput?fileName=/pdf/R-Chip/PYu-AC_51_RoHS_L_6.pdf&src-supplier=Digikey, Manufacturer Part Number=AC0402FR-07100KL, Supplier=LCSC
SW1 SW2: library part GT-TC089A-H043-L1, "SMD Tactile Switches ROHS", Manufacturer=G-Switch, Supplier Part Number=C843623, Manufacturer Part Number=GT-TC089A-H043-L1, Supplier=LCSC
U1: "SMD module, ESP32-S3FN8, 8 MB SPI flash, PCB antenna", Manufacturer="Espressif Systems", Supplier Part Number=C2913206, ComponentLink1Description=https://datasheet.octopart.com/ESP32-S3-MINI-1-N8-Espressif-Systems-datasheet-165560562.pdf?src-supplier=TME, ComponentLink1URL=https://datasheet.octopart.com/ESP32-S3-MINI-1-N8-Espressif-Systems-datasheet-165560562.pdf?src-supplier=TME, Manufacturer Part Number=ESP32-S3-MINI-1-N8, Supplier=LCSC
U2: "IC USB SERIAL FULL UART 20QFN", Manufacturer=FTDI, Supplier Part Number=C132159, ComponentLink1Description=https://datasheet.ciiva.com:443/pdfs/VipMasterIC/IC/FTDI/FTDIS00099/FTDIS00099-1.pdf?src-supplier=IHS+Markit, ComponentLink1URL=https://datasheet.ciiva.com:443/pdfs/VipMasterIC/IC/FTDI/FTDIS00099/FTDIS00099-1.pdf?src-supplier=IHS+Markit, ComponentLink2Description=https://datasheet.ciiva.com/1787/ds-ft231x-1787312.pdf?src-supplier=Digikey, ComponentLink2URL=https://datasheet.ciiva.com/1787/ds-ft231x-1787312.pdf?src-supplier=Digikey, ComponentLink3Description=https://datasheet.ciiva.com/4787/ds-ft231x-13571-4787570.pdf?src-supplier=Mouser, ComponentLink3URL=https://datasheet.ciiva.com/4787/ds-ft231x-13571-4787570.pdf?src-supplier=Mouser, ComponentLink4Description=https://datasheet.ciiva.com/30475/0900766b811020d3-30475405.pdf?src-supplier=Rs, ComponentLink4URL=https://datasheet.ciiva.com/30475/0900766b811020d3-30475405.pdf?src-supplier=Rs, ComponentLink5Description=https://datasheet.ciiva.com/1787/ft-x-series-1787313.pdf?src-supplier=Digikey, ComponentLink5URL=https://datasheet.ciiva.com/1787/ft-x-series-1787313.pdf?src-supplier=Digikey, ComponentLink6Description=https://datasheet.ciiva.com/1787/ft-x-series-1787314.pdf?src-supplier=Digikey, ComponentLink6URL=https://datasheet.ciiva.com/1787/ft-x-series-1787314.pdf?src-supplier=Digikey, Manufacturer Part Number=FT231XQ-R, Supplier=LCSC
U3: "Buck Switching Regulator IC Positive Fixed 3.3V 1 Output 1A 8-WFDFN Exposed Pad", Manufacturer="Texas Instruments", Supplier Part Number=C40256, ComponentLink1Description=https://datasheet.ciiva.com/2034/tps62161-2034675.pdf?src-supplier=Digikey, ComponentLink1URL=https://datasheet.ciiva.com/2034/tps62161-2034675.pdf?src-supplier=Digikey, Manufacturer Part Number=TPS62162DSGR, Supplier=LCSC

## Via types
v1: diameter 24, hole 12, L1 to L4, tented both sides, 146 vias

## Nets (pads, with @x,y where several pads share a name; then routed paths per layer and width w, separated by ;. In a path a pad name is that pad's centre, name@x,y a point inside that pad or via, vN(x,y) a via of type N, cw(c..) or ccw(c..) an arc to the next point about the centre after c; other vN are vias at no path point)
+3V3: C1.2 C3.2 C12.2 C13.2 J1.2 J2.1 J6.2 R2.1 R3.1 R14.2 R15.2 R16.2 U1.3 | length 5229.7
  L1 w15: C12.2 2522,865.75 v1@2541.23,884.98 ; v1(2584,891) C13.2 2584,843.79 2617.36,810.43 U1.3 ; J2.1@2696.73,46.73 C1.2
  L1 w17: R2.1 844.76,507.35 845.12,506.99 964.01,506.99 v1(965,506)
  L1 w20: R3.1 1035.54,890.75 1058.79,914 v1(1103,914) 1538.5,914 1703.01,749.49 1802.55,749.49 1837,783.94 R16.2 1900.67,784.25 1904.92,780 v1(1906,780) ; J1.2 2599,970 2638,931 2638,929.72 2680.27,887.45 C3.2 ; J2.1@2693.73,46.27 J2.1 J2.1@2696.73,46.73
  L1 w25: R14.2 1659.97,185.25 1705.22,140 1779.78,140 R15.2@1825.03,185.25 ; R15.2 1864.25,185.25 v1(1884,205)
  L2 w40: v1(965,506) 1027,568 1027,846 1087,906 1379,906 1425,860 1425,461.85 1553.43,333.43 1755.57,333.43 v1(1884,205) 1960,129 v1(2696,129) ; v1(1906,780) 2032.04,780 2086.04,834 2488,834 v1(2542,888) 2545,891 v1(2584,891) 2585.41,892.41 2585.41,965.41 J1.2
"+3V3 FTDI": C7.2 C8.2 R3.2 R5.1 U2.10 U2.20 | length 549.5
  L1 w10.01: U2.20@838.81,849.45 838.9,849.37 841.68,849.37 851.31,859 861,859
  L1 w15: 861,859 875.6,859 875.72,858.88 C7.2@911.39,858.88 ; C7.2@912.49,858.76 982.51,858.76 R3.2 984.36,857.89 1001.21,857.89 1010,849.11 1010,816.94 1000.36,807.3 986.72,807.3 v1(985,805.57)
  L4 w6: v1(701,745) 820.69,745 863,787.31 881.27,805.57 v1(985,805.57)
+3V3_REG: C15.2 J6.1 L1.2 R23.2 U3.6 | length 1121.1
  L1 w15: U3.6@845.37,260.35 858.47,260.35 881.82,237 v1(924,237)
  L1 w20: v1(834,395) 834.23,394.77 834.23,363.23 C15.2 ; R23.2 v1(905,390) ; v1(935,350.43) 935.77,351.2 979.9,351.2 985,356.3 L1.2@981.63,359.67
  L2 w40: 1375,427 J6.1
  L2 w60: v1@935,350 924,339 v1(924,237) 924,223 983,164 1293,164 1375,246 1375,427
+5V: C10.2 C16.2 J1.22 J5.2 R1.1 U3.2 U3.3 | length 1443.2
  L1 w15: v1(657,263) 659.44,263 661.44,261 C16.2 704.18,260.81 779.07,260.81 U3.3 U3.2
  L1 w17: R1.1@781.41,507.63 R1.1@781.41,508
  L1 w25: v1(725,508) R1.1@781.41,508
  L1 w30: J1.22 594.59,965.41 594.59,919.04 610,903.63 C10.2
  L2 w40: J1.22 594.59,965.41 594.59,885.41 631,849
  L2 w60: 631,849 631,660.54 715,576.54 715,341.54 657,283.54 v1(657,263)
  L4 w6: J5.2 724,509 v1(725,508)
+5V_VBUS1: "J3.A4 B9" "J3.B4 A9" C2.2 D1.1 J5.1 R7.2 | length 1713.1
  L1 w15: 427.9,660.64 435.52,668.27 C2.2
  L1 w20: 272.64,700.43 167.28,700.43 137,730.72 137,855 171.41,889.41 272.64,889.41 ; 273.23,701.02 D1.1@370.01,701.02 ; D1.1 371.03,651 ; 427.9,660.64 417.25,650 372.03,650 371.03,651 ; R7.2 945.06,675 974.17,645.89 974.37,645.89 999,621.25 999,456.72 987.28,445 721.19,445 607.19,559 J5.1 371.03,561.03 371.03,651
+5V_VBUS2: "J4.A4 B9" "J4.B4 A9" C4.2 D2.1 J5.3 | length 973.9
  L1 w20: 272.64,115.59 173.41,115.59 136,153 136,275 165.57,304.57 272.64,304.57 348.57,304.57 392.13,348.13 416.11,348.13 D2.1 C4.2 ; J5.3@365,460 366,461 526,461 540.54,446.46 C4.2@540.54,375
"+VCC FTDI": C5.2 C6.2 R1.2 R2.2 U2.12 | length 271.6
  L1 w10.01: 750.31,717 U2.12@750.31,741.1
  L1 w15: 750.31,717 750.31,703.97 783.28,671 804.48,671 813.27,662.21 C5.2 R2.2
"BTN _GPIO0": C14.2 Q2.3 R18.1 SW2.1 SW2.2 | length 1268.4
  L1 w6: Q2.3 1104.6,479.29 1115.35,468.54 1117.32,468.54 1154.86,431 1197,431 1236.61,470.61 SW2.2 1236.61,683.61 1261,708 1530,708 1562,676 1562,637.8 SW2.1 1565.24,638.27 C14.2 1726.4,638.27 1814.13,726 1980,726 1988.25,734.25 R18.1
CHIP_PU: J2.3 Q1.3 R14.1 SW1.1 SW1.2 U1.45 | length 3536.9
  L1 w6: Q1.3 1133.26,873.74 1196.02,810.98 1196.02,559.35 1163.96,527.28 1092.14,527.28 1073.85,508.99 1073.85,334.29 1092.14,316 1181.91,316 1226.91,271 1226.91,196.12 SW1.2 SW1.1 1598.42,186.42 1628.75,216.75 R14.1 1658,389 1575,472 v1(1575,543) ; J2.3 2595,145 2641,145 2684.29,188.29 U1.45
  L4 w6: v1(1575,543) 2061.64,543 2065.64,547 2129.18,547 2133.18,543 2182.82,543 2375.11,350.7 2595.3,350.7 2650.83,295.18 2650.83,183.11 2527.09,59.38 2523.99,59.38 2509.61,45 J2.3
CON1_USB_N: D4.1 J3.A7 J3.B7 R4.1 | length 575.5
  L1 w6.03: J3.A7 225.92,785.08 218,793 218,818.47 223.98,824.45 J3.B7 341.45,824.45 351,834 371.03,834 D4.1 372.03,817.98 384.72,805.29 v1(385.31,805.29) ; v1(535,758.5) 538.53,758.5 547.52,767.48 576.85,767.48 581.25,763.08 R4.1
  L4 w6.03: v1(385.31,805.29) 385.31,808.09 375.59,817.81 375.59,825.33 393.22,842.97 432.11,842.97 507.6,767.48 522.48,767.48 531.47,758.5 v1(535,758.5)
CON1_USB_P: D3.1 J3.A6 J3.B6 R6.1 | length 545.1
  L1 w6.03: J3.B6 272.94,765.7 311.7,765.7 ; J3.A6 307.24,804.76 311.7,800.3 311.7,765.7 ; v1(353,798) 357.04,798 372.03,783.01 D3.1 371.73,765.7 311.7,765.7 ; v1(535,790.5) 538.53,790.5 547.52,781.52 576.85,781.52 580.38,785.05 580.38,805.13 R6.1
  L4 w6.03: v1(353,798) 353,801.96 361.56,810.52 361.56,831.15 387.41,857 437.92,857 513.41,781.52 522.48,781.52 531.47,790.5 v1(535,790.5)
CON2_USB_N: D6.1 J4.A7 J4.B7 R22.1 | length 2110.6
  L1 w6.03: D6.1 409,244 415.97,237.03 447.87,237.03 ; 447.89,237.05 486.18,237.05 497,247.87 v1(497,251) ; v1(1798,509) 1798.5,509 1814.49,493.02 1959.35,493.02 1962.88,496.55 1962.88,520.37 R22.1
  L1 w6.23: J4.A7 222.76,200.24 216,207 216,231 224.61,239.61 J4.B7 345.61,239.61 373,267 408.02,267 D6.1
  L4 w6.03: v1(497,251) 498.35,249.65 498.35,234.65 582.02,150.98 895.21,150.98 929.27,185.05 1011.05,185.05 1185.59,359.59 1449.49,359.59 1583.92,494.02 1692.41,494.02 1693.41,493.02 1782.51,493.02 1798,508.5 v1(1798,509)
CON2_USB_P: D5.1 J4.A6 J4.B6 R24.1 | length 2046.7
  L1 w6.03: J4.B6 273.09,181 316.55,181 ; J4.A6 309.08,219.92 316,213 316,181.55 316.55,181 ; v1(490.65,209.07) 490.65,212.2 479.83,223.02 453.7,223.02 421,223 409,211 D5.1 409,167 405,163 351,163 333,181 316.55,181 ; v1(1799,463) 1799,463.5 1814.49,478.98 1959.35,478.98 1963.5,474.83 R24.1
  L4 w6.03: v1(490.65,209.07) 492.78,206.94 506.22,206.94 576.2,136.95 901.02,136.95 935.08,171.02 1016.86,171.02 1191.4,345.56 1455.3,345.56 1589.73,479.98 1686.6,479.98 1687.6,478.98 1782.51,478.98 1798.5,463 v1(1799,463)
CON_ESP_USB_N: J2.21 R25.1 | length 1649.2
  L1 w6.03: J2.21 706.09,56.09 728.2,56.09 812.98,140.87 1037.49,140.87 1142.46,245.84 1142.46,260.46 v1(1144,262) ; R25.1 2026.24,522 v1(2076,522)
  L4 w6.03: v1(1144,262) 1146.16,259.84 1161.51,259.84 1172.66,270.98 1308.79,270.98 1357.85,320.05 1497.01,320.05 1577.97,401 1779.16,401 1873.13,494.97 2064.47,494.97 2072.56,503.06 2072.56,518.56 v1(2076,522)
CON_ESP_USB_P: J2.20 R27.1 | length 1580.3
  L1 w6.03: J2.20 795,103.05 818.79,126.84 1043.3,126.84 1145.78,229.32 1162.98,229.32 v1(1163.3,229) ; R27.1 2029.5,448 v1(2076,448)
  L4 w6.03: v1(1163.3,229) 1166.08,231.78 1166.08,244.56 1178.47,256.95 1314.6,256.95 1363.66,306.02 1502.83,306.02 1583.78,386.97 1784.97,386.97 1878.94,480.94 2064.47,480.94 2076,469.41 v1(2076,448)
CON_GPIO0: J1.3 R17.1 | length 588.3
  L1 w6: R17.1 1987.25,855.25 2005,873 2406.18,873 2490,956.82 J1.3
DTR_FTDI: Q2.2 R21.2 U2.18 | length 403
  L1 w6: U2.18@838.9,810 855.79,810 859.39,806.39 906.79,806.39 980.09,733.09 980.09,732.91 1033.75,679.25 R21.2 1068,560.8 Q2.2
ESP_USB_N: R22.2 R25.2 U1.23 | length 216.7
  L1 w6.03: R25.2@1994.25,523 1994.25,492.75 1999.66,487.34 2156.96,487.34 2166.57,496.96 U1.23
ESP_USB_P: R24.2 R27.2 U1.24 | length 202.4
  L1 w6.03: R27.2@1995,450 1995.52,450.52 1995.52,466.52 2002.11,473.11 2156.96,473.11 2166.57,463.5 U1.24
FTDI_USB_N: R4.2 U2.9 | length 121.7
  L1 w6.03: R4.2 611.87,743.87 611.87,764.44 615.41,767.97 650.81,767.97 673,790.16 673.16,790.31 U2.9@701.1,790.31
FTDI_USB_P: R6.2 U2.8 | length 123.6
  L1 w6.03: R6.2 611,785.53 614.53,782 645,782 673,810 U2.8@701.1,810
GND: "J3.A1 B12" "J3.B1 A12" "J4.A1 B12" "J4.B1 A12" C1.1 C2.1 C3.1 C4.1 C5.1 C6.1 C7.1 C8.1 C9.1 C10.1 C12.1 C13.1 C14.1 C15.1 C16.1 D1.2 D2.2 D3.2 D4.2 D5.2 D6.2 D7.1 J1.1 J1.23 J2.2 J2.24 J3.S1 J3.S2 J3.S3 J3.S4 J4.S1 J4.S2 J4.S3 J4.S4 R8.2 R9.1 R10.1 R11.1 R12.1 R13.1 SW1.3 SW1.4 SW2.3 SW2.4 U1.1 U1.2 U1.42 U1.43 U1.46 U1.47 U1.48 U1.49 U1.50 U1.51 U1.52 U1.53 U1.54 U1.55 U1.56 U1.57 U1.58 U1.59 U1.60 U1.61 U1.62 U1.63 U1.64 U1.65 U1.66 U1.67 U1.68 U1.69 U1.70 U1.71 U1.72 U1.73 U2.3 U2.13 U2.21 U3.1 U3.4 U3.5 | length 3409.7
  L1 w10.01: C9.1@752.89,627.27 v1@779,601.16 ; v1@758,912.67 770,900.67 U2.3@770,878.9 ; 770.08,728.92 v1(798,701) ; v1@846.87,547.13 C5.1@846.87,578.87 ; v1@846.87,618.13 C6.1@846.87,649.42
  L1 w12: v1@405.25,757 412.37,764.13 D3.2@422.13,764.13 ; v1@427.45,812.8 D4.2@427.45,831.13 ; C2.1 538.49,701.73 541.75,705 v1(545,705) ; C4.1 v1(574,403)
  L1 w14: v1@530.58,900.58 556.63,900.58 C10.1@576.43,880.78 ; v1@583.38,634.62 C8.1@583.38,677.89
  L1 w15: v1@187.44,658 198.37,668.94 272.64,668.94 ; 285.43,336.06 v1@317.65,368.28 ; v1(365,376) D2.2 ; D5.2@409,137.61 v1@427.3,155.91 ; D6.2 v1(441,318) ; D1.2 v1(455,700) ; v1@458.51,784.51 R10.1@491.76,784.51 ; R11.1@493.97,848.5 512.75,829.72 v1@530.28,829.72 ; v1(543,332.5) 543,308.5 R13.1 ; R12.1@557.13,184.87 v1@590.87,184.87 ; U3.5@845,235.9 845,212.44 847,210.44 v1(847,208) ; v1@886.94,911.12 C7.1@906.33,891.73 ; R8.2 v1(945.75,576.25) ; R9.1@946,609 v1@966,609 ; v1@1528.59,870.96 1528.59,845.81 SW2.3@1560.13,814.27 ; v1@1633.85,672.42 C14.1@1677.68,672.42 ; v1@1718.28,197.69 1733.28,182.69 D7.1@1756.68,182.69 ; v1(2065.72,754.28) 2068.15,754.28 2086.42,772.55 U1.63 ; v1(2095,220) 2095.68,220.69 2173.76,220.69 U1.64 ; C12.1@2488.3,856.77 C12.1 2488.54,915.54 v1(2488.77,915.77) ; v1(2581.72,313.28) 2581.72,224.92 U1.42@2584.58,222.06 ; J2.2@2607.22,45.69 2646.18,84.65 ; C13.1 2617.46,851.33 2646.8,822 v1(2648,822) 2670,822 ; U1.43@2618.05,222.06 v1@2618.05,278.17 ; 2646.18,84.93 2663.95,102.7 ; v1(2650.83,732.92) U1.2 ; U1.1 2684.29,807.71 2670,822 ; v1(2686,262.71) U1.46 ; v1(2686,296.17) U1.47 ; v1(2686,329.64) U1.48 ; v1(2686,363.1) U1.49 ; v1(2686,396.57) U1.50 ; v1(2686,430.03) U1.51 ; v1(2686,463.5) U1.52 ; v1(2686,496.96) U1.53 ; v1(2686,530.43) U1.54 ; v1(2686,563.89) U1.55 ; v1(2686,597.35) U1.56 ; v1(2686,630.82) U1.57 ; v1(2686,664.28) U1.58 ; v1@2686,700 U1.59@2724.35,700 ; v1(2686,731.21) U1.60 ; J1.1 2690,917 2714,893 2714,857.27 C3.1 ; U1.65 2728.28,218.72 2728.28,181.72 v1(2730,180) ; U1.62 2725.63,808.37 2712,822 2670,822
  L1 w16: C16.1 750,319.49 v1(769.51,330.1) v1@777.6,327.72
  L1 w20: 272.64,84.09 v1@349.91,84.09 ; 272.64,920.91 340.82,920.91 v1@353.73,908 ; SW2.4@1237.49,814.46 v1@1237.49,863.49 ; SW1.4@1241.24,364.27 v1(1281.65,404.69) ; SW1.3@1564.07,364.27 1564.07,419.99 1566.68,422.6 v1(1566.68,423.69) ; v1@2332.46,561.46 U1.71@2384.62,561.46 ; v1@2332.92,432 U1.73 ; v1@2332.92,496.96 U1.72 ; v1@2450.04,379.84 U1.70 ; U1.69 v1@2450.04,614.08 ; U1.68 v1@2567.16,432 ; U1.67 v1@2567.16,496.96 ; U1.66 v1@2567.16,561.92
  L4 w6: v1(2648,822) v1@2648.16,821.84
  other v1: 350,84 429.17,155.91 849,174 816,175 783,176 591,185 1717.68,197.69 814,207 783,209 2618.26,278.39 322,370 2450.5,379.38 2332.46,431.54 2567.62,432.46 2115,450 2483.46,463.46 2416,464 2332.46,496.5 2567.62,497.42 2115,520 2483,531 847,547 2332,561 2567.62,562.38 779,601 967,608 2449.58,614.54 847,618 583.63,634.37 185,658 1626.68,667.69 2684.72,700 402,757 458.27,784.27 745,785 430,807 745,820 790,820 532,828 1237.68,863.69 1526.87,872.69 529,899 354,908 758,913 885.22,916.21
GPIO0: R17.2 R18.2 U1.4 | length 669.3
  L1 w6: R18.2 2019.25,765.5 2019.25,824.5 R17.2 2569,825 2583.9,810.1 U1.4
GPIO1: J1.4 U1.5 | length 377
  L1 w6: v1(2550,716) 2550.22,716.22 2550.22,772.33 U1.5
  L4 w6: J1.4 2550,810 v1(2550,716)
GPIO2: D8.1 J1.5 U1.6 | length 1191.4
  L1 w6: D8.1 1759.97,818.7 1841.27,900 v1(2395,900) ; v1(2516,670) 2516.48,670.48 2516.48,772.07 U1.6
  L4 w6: J1.5 2290,959.89 2314.04,935.85 2354.15,935.85 2383.41,906.59 2384.62,906.59 2392.5,898.71 2392.5,897.5 2516,774 v1(2516,670)
GPIO3: J1.6 U1.7 | length 478.2
  L1 w6: v1@2483.5,716.43 U1.7
  L4 w6: J1.6 2244.15,915.85 2324,915.85 2483.29,756.57 v1(2483.29,716.22)
GPIO4: J1.7 U1.8 | length 639
  L1 w6: v1@2449.77,670.7 U1.8@2449.77,772.28
  L4 w6: J1.7 2140,920 2211.72,920 2235.86,895.85 2315.72,895.85 2449.29,762.28 v1(2449.29,670.22)
GPIO5: J1.8 U1.9 | length 617.3
  L1 w6: v1@2416.57,716.43 U1.9
  L4 w6: J1.8 2040,920 2111.72,920 2131.72,900 2203.43,900 2228.43,875 2308.28,875 2416.36,766.93 v1(2416.36,716.22)
GPIO6: J1.9 U1.10 | length 786.9
  L1 w6: v1@2382.84,670.7 U1.10@2382.84,772.28
  L4 w6: J1.9 1890,955.39 1905.73,939.65 1905.73,939.27 1935,910 1985,910 2000,895 2108.43,895 2123.43,880 2195.15,880 2220.15,855 2300,855 2382.36,772.64 v1(2382.36,670.22)
GPIO7: J1.10 U1.11 | length 756.4
  L1 w6: v1@2349.65,716.43 U1.11
  L4 w6: J1.10 1830,930 1865,930 1905,890 1976.72,890 1991.72,875 2100.15,875 2115.15,860 2186.86,860 2211.86,835 2291.72,835 2349.43,777.29 v1(2349.43,716.22)
GPIO8: J1.11 U1.12 | length 909.4
  L1 w6: v1@2315.91,670.7 U1.12@2315.91,772.28
  L4 w6: J1.11 1750,910 1856.72,910 1896.72,870 1968.43,870 1983.43,855 2091.86,855 2106.86,840 2178.58,840 2203.58,815 2270,815 2315.43,769.57 v1(2315.43,670.22)
GPIO9: J1.12 U1.13 | length 883.8
  L1 w6: v1@2282.72,716.43 U1.13
  L4 w6: J1.12 1670,890 1848.43,890 1888.43,850 1960.15,850 1975.15,835 2083.58,835 2098.58,820 2170.29,820 2195.29,795 2255,795 2282.5,767.5 v1(2282.5,716.22)
GPIO10: J1.13 U1.14 | length 1026.2
  L1 w6: v1@2248.98,670.7 U1.14@2248.98,772.28
  L4 w6: J1.13 1590,870 1840.15,870 1880.15,830 1951.86,830 1966.86,815 2075.29,815 2094.3,795.99 2166.02,795.99 2187.01,775 2215.29,775 2248.5,741.79 v1(2248.5,670.22)
GPIO11: J1.14 U1.15 | length 986.8
  L1 w6: v1(2215.57,716.22) U1.15@2215.57,772.33
  L4 w6: J1.14 1515,845 1836.86,845 1871.86,810 1943.58,810 1958.58,795 2067.01,795 2086.02,775.99 2155.8,775.99 v1(2215.57,716.22)
GPIO12: J1.15 U1.16 | length 988.7
  L1 w6: v1(2030,725) 2030.2,724.8 2117.99,724.8 2124.4,731.21 U1.16
  L4 w6: J1.15 1440,820 1796.82,820 1866.82,750 2005,750 v1(2030,725)
GPIO13: J1.16 U1.17 | length 1097.2
  L1 w6: v1(1969,698) 1969.13,697.87 2174.32,697.87 U1.17
  L4 w6: J1.16 1365,795 1793.53,795 1858.53,730 1937,730 v1(1969,698)
GPIO14: J1.17 U1.18 | length 1211.1
  L1 w6: v1(1915,685) 1935.72,664.28 U1.18
  L4 w6: J1.17 1290,770 1790.25,770 1850.25,710 1890,710 v1(1915,685)
GPIO15: J1.18 U1.19 | length 1325.3
  L1 w6: v1(1840,680) 1889.59,630.41 2174.04,630.41 U1.19
  L4 w6: J1.18 1037,923 1210,750 1759.28,750 1785.28,724 1796,724 v1(1840,680)
GPIO16: J1.19 U1.20 | length 1440
  L1 w6: v1(1849,632) 1849,630 1881.65,597.35 U1.20
  L4 w6: J1.19 943,917 1014.72,917 1216.72,715 1766,715 v1(1849,632)
GPIO17: J1.20 U1.21 | length 1552.7
  L1 w6: v1(1783,653) 1872.11,563.89 U1.21
  L4 w6: J1.20 793.3,970 858.22,905.08 858.22,905.03 860.25,903 874.04,889.21 1014.22,889.21 1208.43,695 1741,695 v1(1783,653)
GPIO18: J1.21 U1.22 | length 1826.1
  L1 w6: U1.22 2179.29,535.27 2194.6,535.27 2235.32,575.99 2235.32,581.32 v1(2238,584)
  L4 w6: J1.21 690,919.93 706.93,903 760.93,849 863,849 997.86,849 1241.86,605 2217,605 v1(2238,584)
GPIO21: J2.19 U1.25 | length 1438.9
  L1 w6: v1(2045,407) 2079.44,407 2089.01,416.57 2123,416.57 2136.46,430.03 U1.25
  L4 w6: J2.19 965,115 1108.43,115 1148.43,155 1291.86,155 1386.86,250 1526.86,250 1601.86,325 1807.5,325 1859.5,377 1968.82,377 1998.82,407 v1(2045,407)
GPIO26: J2.18 U1.26 | length 1325.1